# EAGLE board ViaCar Main (EAGLE 5.11)
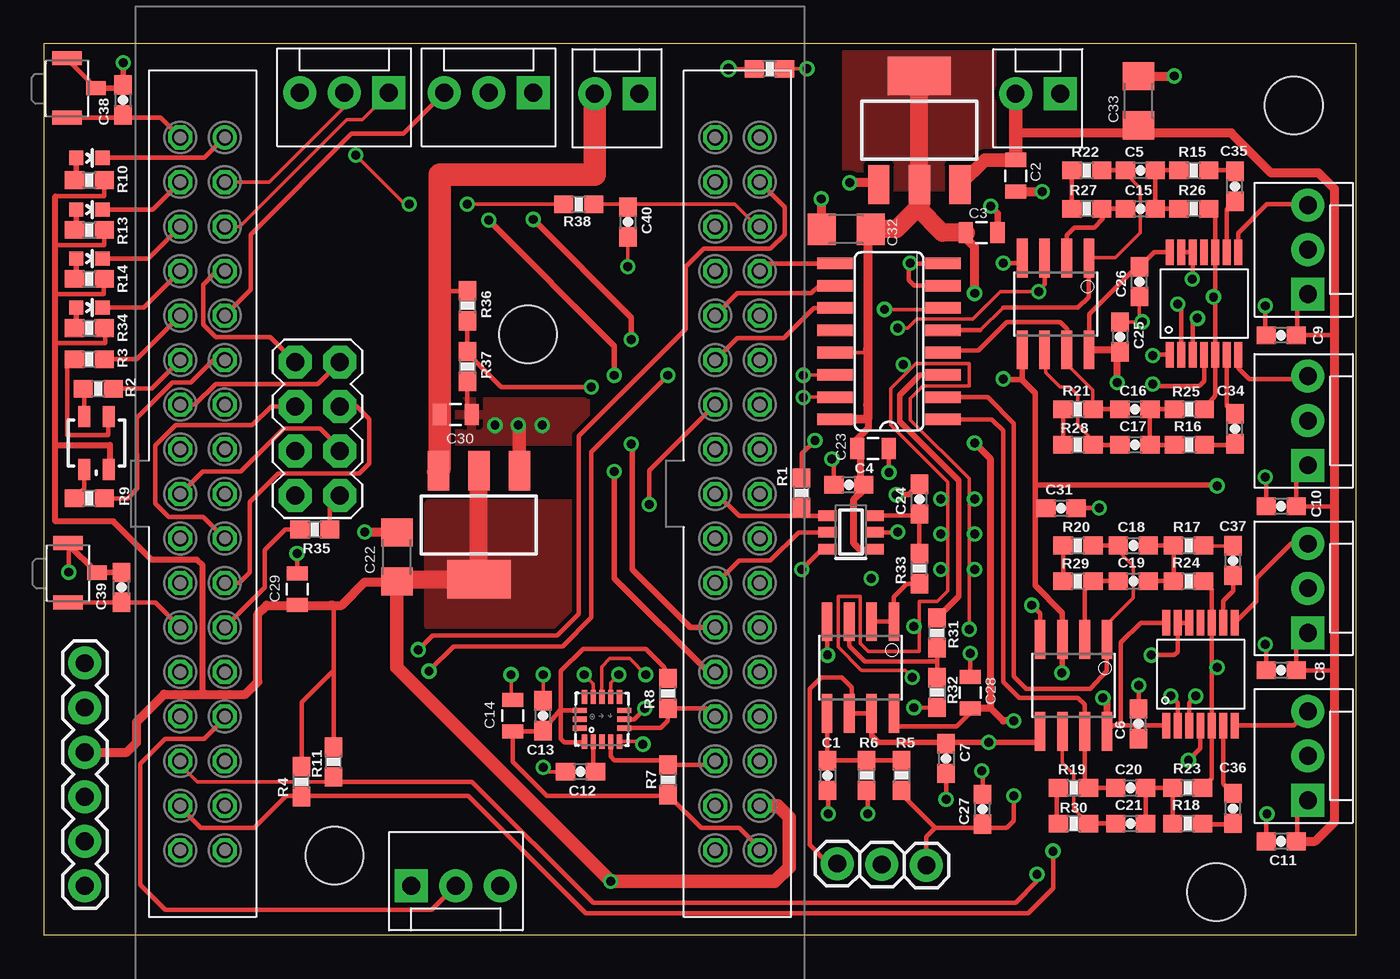
[diagram p0: board, top side]
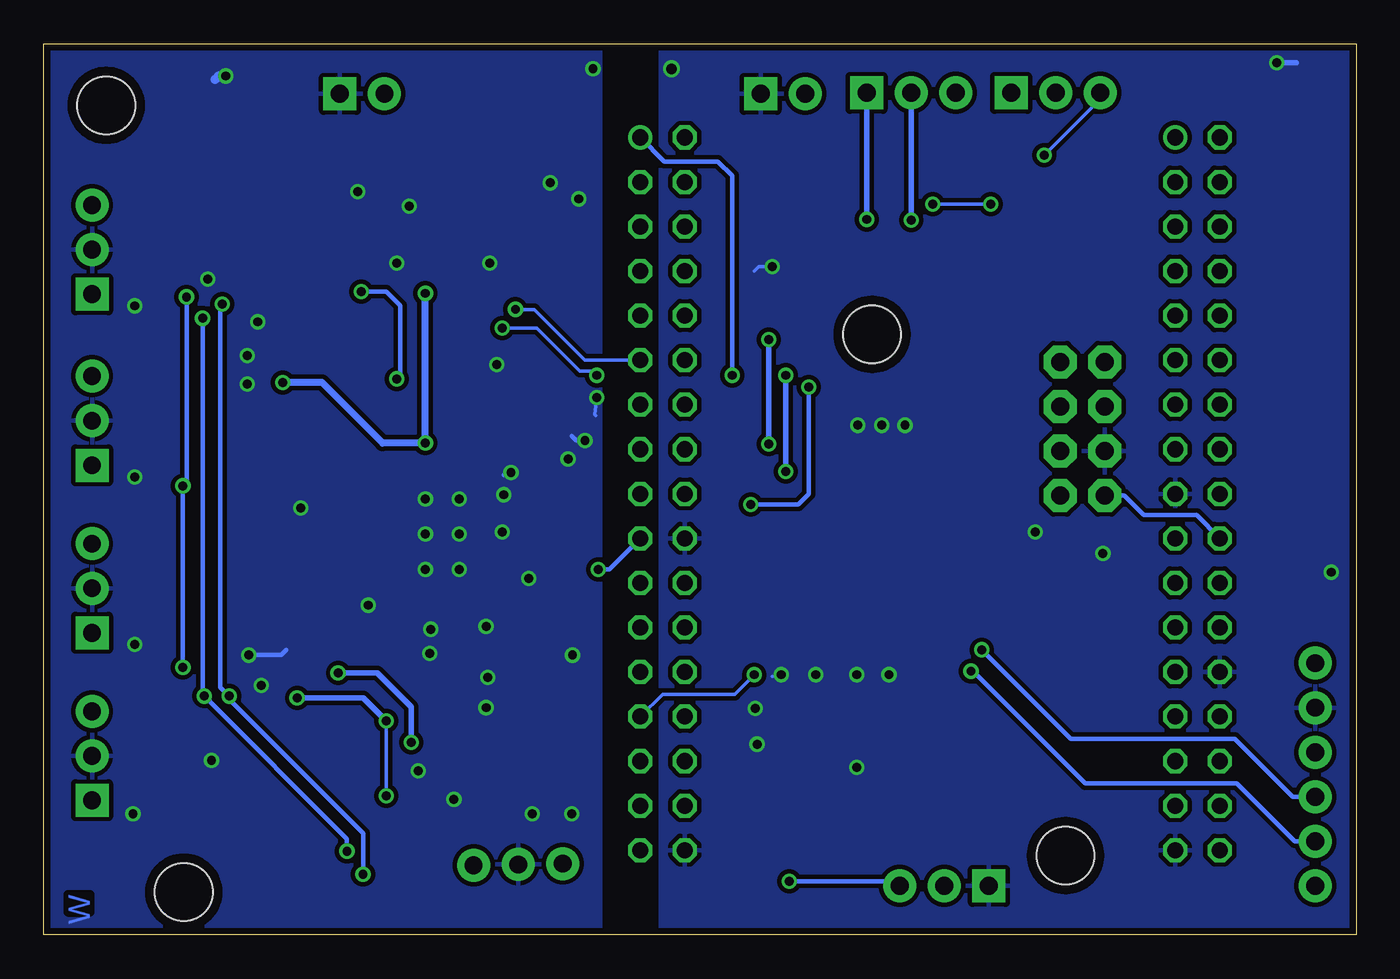
[diagram p1: board, bottom side, seen from below]

Size 74.78 x 50.8 mm. Coordinates in mm from the lower left corner, seen from the top.
Outline: 0,0 74.78,0 74.78,50.8 0,50.8 0,0
Copper layers (1*16): Top 0.0356mm / dielectric 1.5011mm / Bottom 0.0356mm
Design rules "LaenPCBOrder": minimum track width 6mil, minimum drill 13mil, track to track 6mil, track to pad 6mil, pad to pad 6mil, via to via 6mil, smd to smd 6mil, copper to edge 15mil, drill to drill 6mil, minimum pad ring 7mil, minimum via ring 7mil, stop-mask expansion 4mil, vias tented up to drill 0mil, thermal gap 10mil

## Footprints (pad centres in the part's own frame; a part is rotated, then mirrored left to right if it is on the bottom)
0603-CAP = smd 1.1 x 1: 1 -0.85,0; 2 0.85,0
0805 = smd 0.8 x 1.2: 1 -0.9,0; 2 0.9,0
1206 = smd 1.6 x 1.8: 1 -1.4,0; 2 1.4,0
SO16 = smd 0.66 x 2.032: 1 -4.445,-3.073; 2 -3.175,-3.073; 3 -1.905,-3.073; 4 -0.635,-3.073; 5 0.635,-3.073; 6 1.905,-3.073; 7 3.175,-3.073; 8 4.445,-3.073; 9 4.445,3.073; 10 3.175,3.073; 11 1.905,3.073; 12 0.635,3.073; 13 -0.635,3.073; 14 -1.905,3.073; 15 -3.175,3.073; 16 -4.445,3.073
SO08 = smd 0.61 x 2.21: 1 -1.905,-2.616; 2 -0.635,-2.616; 3 0.635,-2.616; 4 1.905,-2.616; 5 1.905,2.616; 6 0.635,2.616; 7 -0.635,2.616; 8 -1.905,2.616
SOT223 = smd 1.219 x 2.235: 1 -2.311,-3.099; 2 0,-3.099; 3 2.311,-3.099 | smd 3.6 x 2.2: 4 0,3.099
MOLEX-1X3 = drill 1.016 pad 1.88 square: 1 0,0 | drill 1.016 pad 1.88 round: 2 2.54,0; 3 5.08,0
MOLEX-1X2 = drill 1.016 pad 1.88 square: 1 0,0 | drill 1.016 pad 1.88 round: 2 2.54,0
STAND-OFF = hole 3.302: 0,0
1X06 = drill 1.016 pad 1.88 round: 1 0,0; 2 2.54,0; 3 5.08,0; 4 7.62,0; 5 10.16,0; 6 12.7,0
LED-0603 = smd 0.8 x 0.8: A 0,-0.75; C 0,0.75
0603-RES = smd 1.1 x 1: 1 -0.85,0; 2 0.85,0
1X01 = drill 1.016 pad 1.88 round: 1 0,0
QFN-16_0.5MM = smd 0.8 x 0.3: 1 -1.275,1; 2 -1.275,0.5; 3 -1.275,0; 4 -1.275,-0.5; 5 -1.275,-1; 9 1.275,-1; 10 1.275,-0.5; 11 1.275,0; 12 1.275,0.5; 13 1.275,1 | smd 0.3 x 0.8: 6 -0.5,-1.275; 7 0,-1.275; 8 0.5,-1.275; 14 0.5,1.275; 15 0,1.275; 16 -0.5,1.275
OPENLPC1769-BREAKOUT = drill 0.914 round: 1 -15.24,-20.32; 35 15.24,-20.32 | drill 0.914 octagon: 2 -12.7,-20.32; 3 -15.24,-17.78; 4 -12.7,-17.78; 5 -15.24,-15.24; 6 -12.7,-15.24; 7 -15.24,-12.7; 8 -12.7,-12.7; 9 -15.24,-10.16; 10 -12.7,-10.16; 11 -15.24,-7.62; 12 -12.7,-7.62; 13 -15.24,-5.08; 14 -12.7,-5.08; 15 -15.24,-2.54; 16 -12.7,-2.54; 17 -15.24,0; 18 -12.7,0; 19 -15.24,2.54; 20 -12.7,2.54; 21 -15.24,5.08; 22 -12.7,5.08; 23 -15.24,7.62; 24 -12.7,7.62; 25 -15.24,10.16; 26 -12.7,10.16; 27 -15.24,12.7; 28 -12.7,12.7; 29 -15.24,15.24; 30 -12.7,15.24; 31 -15.24,17.78; 32 -12.7,17.78; 33 -15.24,20.32; 34 -12.7,20.32; 36 17.78,-20.32; 37 15.24,-17.78; 38 17.78,-17.78; 39 15.24,-15.24; 40 17.78,-15.24; 41 15.24,-12.7; 42 17.78,-12.7; 43 15.24,-10.16; 44 17.78,-10.16; 45 15.24,-7.62; 46 17.78,-7.62; 47 15.24,-5.08; 48 17.78,-5.08; 49 15.24,-2.54; 50 17.78,-2.54; 51 15.24,0; 52 17.78,0; 53 15.24,2.54; 54 17.78,2.54; 55 15.24,5.08; 56 17.78,5.08; 57 15.24,7.62; 58 17.78,7.62; 59 15.24,10.16; 60 17.78,10.16; 61 15.24,12.7; 62 17.78,12.7; 63 15.24,15.24; 64 17.78,15.24; 65 15.24,17.78; 66 17.78,17.78; 67 15.24,20.32; 68 17.78,20.32
LED-TRICOLOR-SMD = smd 0.7 x 1.2: A 0.7,-1.5; B 0.7,1.5; G -0.7,1.5; R -0.7,-1.5
SOT-23-6 = smd 0.6 x 1.05: 1 0,0; 2 0.95,0; 3 1.9,0; 4 1.9,2.7; 5 0.95,2.7; 6 0,2.7
B3U-3100P = smd 0.8 x 1.7: 1 0,0; 2 3.4,0 | smd 0.8 x 1.1: 3 1.7,-1.65
MCP-TSSOP-14 = smd 1.45 x 0.45: P$1 0,0; P$2 0,-0.65; P$3 0,-1.3; P$4 0,-1.95; P$5 0,-2.6; P$6 0,-3.25; P$7 0,-3.9; P$8 5.85,-3.9; P$9 5.85,-3.25; P$10 5.85,-2.6; P$11 5.85,-1.95; P$12 5.85,-1.3; P$13 5.85,-0.65; P$14 5.85,0
2X4 = drill 1.016 pad 1.88 octagon: 1 -3.81,-1.27; 2 -3.81,1.27; 3 -1.27,-1.27; 4 -1.27,1.27; 5 1.27,-1.27; 6 1.27,1.27; 7 3.81,-1.27; 8 3.81,1.27

## Placement (x,y rotation side)
C1  .1u  [0603-CAP]  44.65,9.09 270 top
C2  10uF  [0805]  55.37,43.28 270 top
C3  1uF  [0805]  53.44,40.03 0 top
C4  100n  [0603-CAP]  45.87,25.65 180 top
C5  270p  [0603-CAP]  62.48,43.59 0 top
C6  100n  [0603-CAP]  62.38,12.04 90 top
C7  100n  [0603-CAP]  51.41,10.06 270 top
C8  100n  [0603-CAP]  70.51,15.09 180 top
C9  100n  [0603-CAP]  70.51,34.19 180 top
C10  100n  [0603-CAP]  70.51,24.43 180 top
C11  100n  [0603-CAP]  70.51,5.33 180 top
C12  .1uF  [0603-CAP]  30.58,9.3 180 top
C13  .1uF  [0603-CAP]  28.45,12.5 90 top
C14  1uF  [0805]  26.72,12.5 90 top
C15  270p  [0603-CAP]  62.48,41.4 0 top
C16  270p  [0603-CAP]  62.18,29.97 0 top
C17  270p  [0603-CAP]  62.18,27.94 0 top
C18  270p  [0603-CAP]  62.08,22.2 0 top
C19  270p  [0603-CAP]  62.08,20.17 0 top
C20  270p  [0603-CAP]  61.93,8.38 0 top
C21  270p  [0603-CAP]  61.93,6.35 0 top
C22  10uF  [1206]  20.12,21.54 90 top
C23  1uF  [0805]  47.24,27.74 0 top
C24  DNI  [0603-CAP]  49.89,24.84 90 top
C25  100n  [0603-CAP]  61.32,34.09 270 top
C26  100n  [0603-CAP]  62.43,37.24 90 top
C27  100n  [0603-CAP]  53.49,7.16 90 top
C28  1uF  [0805]  52.78,13.82 90 top
C29  1uF  [0805]  14.43,19.71 90 top
C30  1uF  [0805]  23.47,29.67 0 top
C31  100n  [0603-CAP]  57.96,24.33 0 top
C32  10uF  [1206]  45.72,40.23 180 top
C33  1uF  [1206]  62.38,47.55 90 top
C34  100n  [0603-CAP]  67.87,28.85 90 top
C35  100n  [0603-CAP]  67.87,42.67 90 top
C36  100n  [0603-CAP]  67.77,7.21 90 top
C37  100n  [0603-CAP]  67.77,21.34 90 top
C38  100n  [0603-CAP]  4.52,47.6 90 top
C39  100n  [0603-CAP]  4.42,19.81 90 top
C40  100n  [0603-CAP]  33.27,40.64 270 top
IC1  4051D  [SO16]  48.16,33.83 90 top
IC2  OPA2340U  [SO08]  46.53,15.24 180 top
IC3  VREG1  [SOT223]  49.89,45.87 0 top
IC4  OPA2340U  [SO08]  57.66,35.97 180 top
IC5  OPA2340U  [SO08]  58.67,14.22 180 top
IC6  VREG1  [SOT223]  24.79,23.37 180 top
JP1  CH1  [MOLEX-1X3]  72.03,36.53 90 top
JP2  CH2  [MOLEX-1X3]  72.03,26.77 90 top
JP3  CH3  [MOLEX-1X3]  72.03,17.22 90 top
JP4  CH4  [MOLEX-1X3]  72.03,7.67 90 top
JP5  DPWR  [MOLEX-1X2]  57.91,47.96 180 top
JP6  ENCODER  [MOLEX-1X3]  20.93,2.79 0 top
JP7  APWR  [MOLEX-1X2]  33.93,47.96 180 top
JP8  M Output  [MOLEX-1X3]  27.89,48.01 180 top
JP9  STAND-OFF  [STAND-OFF]  16.56,4.52 0 top
JP10  STAND-OFF  [STAND-OFF]  27.58,34.24 0 top
JP11  STAND-OFF  [STAND-OFF]  71.22,47.29 0 top
JP12  M Input  [MOLEX-1X3]  19.66,48.01 180 top
JP13  XBEE  [1X06]  2.34,2.79 90 top
JP14  STAND-OFF  [STAND-OFF]  66.8,2.44 0 top
LED1  GREEN  [LED-0603]  2.59,44.3 270 top
LED2  GREEN  [LED-0603]  2.59,41.35 270 top
LED3  GREEN  [LED-0603]  2.59,38.56 270 top
LED4  GREEN  [LED-0603]  2.59,35.76 270 top
R1  DNI  [0603-RES]  43.18,25.2 90 top
R2  100  [0603-RES]  3.1,31.14 0 top
R3  100  [0603-RES]  2.59,32.82 0 top
R4  4.7k  [0603-RES]  14.68,8.74 90 top
R5  10k  [0603-RES]  48.87,9.09 270 top
R6  10k  [0603-RES]  46.89,9.09 90 top
R7  4.7k  [0603-RES]  35.56,8.84 270 top
R8  4.7k  [0603-RES]  35.56,13.77 90 top
R9  200  [0603-RES]  2.59,24.89 0 top
R10  330  [0603-RES]  2.59,43.03 0 top
R11  4.7k  [0603-RES]  16.51,9.86 90 top
R12  FB  [0603-RES]  41.35,49.38 180 top
R13  330  [0603-RES]  2.59,40.18 0 top
R14  330  [0603-RES]  2.59,37.39 0 top
R15  7.87k  [0603-RES]  65.53,43.59 0 top
R16  7.87k  [0603-RES]  65.28,27.94 0 top
R17  7.87k  [0603-RES]  65.23,22.2 0 top
R18  7.87k  [0603-RES]  65.18,6.35 0 top
R19  150k  [0603-RES]  58.67,8.38 0 top
R20  150k  [0603-RES]  58.93,22.2 0 top
R21  150k  [0603-RES]  58.93,29.97 0 top
R22  150k  [0603-RES]  59.44,43.59 0 top
R23  414  [0603-RES]  65.18,8.38 180 top
R24  414  [0603-RES]  65.23,20.17 180 top
R25  414  [0603-RES]  65.28,29.97 180 top
R26  414  [0603-RES]  65.53,41.4 180 top
R27  7.87k  [0603-RES]  59.44,41.4 180 top
R28  7.87k  [0603-RES]  58.93,27.94 180 top
R29  7.87k  [0603-RES]  58.93,20.17 180 top
R30  7.87k  [0603-RES]  58.67,6.35 180 top
R31  0  [0603-RES]  50.9,17.22 90 top
R32  DNI  [0603-RES]  50.9,13.82 270 top
R33  200  [0603-RES]  49.89,20.88 90 top
R34  330  [0603-RES]  2.59,34.59 0 top
R35  200  [0603-RES]  15.44,23.11 180 top
R36  100k  [0603-RES]  24.13,35.86 270 top
R37  10k  [0603-RES]  24.13,32.41 270 top
R38  1k  [0603-RES]  30.48,41.66 0 top
TP0  M01PTH  [1X01]  47.75,4.01 0 top
TP1  M01PTH  [1X01]  45.21,4.06 0 top
TP2  M01PTH  [1X01]  50.29,3.96 0 top
U1  MMA8452Q  [QFN-16_0.5MM]  31.8,12.29 90 top
U$1  OPENLPC1769-BREAKOUT  [OPENLPC1769-BREAKOUT]  25.55,25.15 180 top
U$2  LED-TRICOLOR  [LED-TRICOLOR-SMD]  3,28.04 0 top
U$10  ADS7883  [SOT-23-6]  47.35,22 90 top
U$11  B3U-3100P  [B3U-3100P]  1.32,46.58 90 top
U$12  B3U-3100P  [B3U-3100P]  1.37,18.95 90 top
U$13  MCP4651  [MCP-TSSOP-14]  64.16,33.07 90 top
U$14  MCP4651  [MCP-TSSOP-14]  63.96,11.94 90 top
U$19  M04X2  [2X4]  15.6,28.85 270 top

## Library data of the parts
C1-C40 IC3 IC6 JP1-JP14 LED1-LED4 R1-R38 TP0 TP1 TP2 U1 U$2 U$19 = SparkFun
IC1 = 40xx
IC2 IC4 IC5 = burr-brown; MF: TEXAS INSTRUMENTS; MPN: OPA2340UA; OC_FARNELL: 1101541; OC_NEWARK: 36K7581
U$1 = OpenLPC
U$10-U$14 = William

## Nets
3.3V: C13.1 C14.1 R7.2 R8.2 U1.1 U1.14 U$1.33
5V: C3.1 C4.1 C6.1 C23.1 C25.2 C26.2 C27.1 C28.1 C32.1 IC1.13 IC1.16 IC2.8 IC3.2 IC3.4 IC4.8 IC5.8 R5.2 TP2.1 U$10.1 U$13.P$14 U$14.P$1 U$14.P$14
A: IC1.11 U$1.12
ACC_INT1: U1.11 U$1.27
ADC_CS: U$1.19 U$10.6
ADC_SCLK: R1.1 U$1.18 U$10.4
ADC_SDO: U$1.22 U$10.5
AGND: C1.2 C2.2 C3.2 C4.2 C6.2 C7.2 C8.2 C9.2 C10.2 C11.2 C23.2 C24.2 C25.1 C26.1 C27.2 C28.2 C31.2 C32.2 C33.2 IC1.7 IC1.8 IC1.15 IC2.4 IC3.1 IC4.4 IC5.4 JP1.2 JP2.2 JP3.2 JP4.2 JP5.1 R1.2 R6.1 R12.1 R32.2 TP0.1 U$10.2 U$13.P$1 U$13.P$4 U$13.P$12 U$13.P$13 U$14.P$4 U$14.P$12 U$14.P$13
B: IC1.10 U$1.10
BAT_TEST: R36.2 R37.1 U$1.14
BRAKE: JP8.1 U$1.24
C: IC1.9 U$1.7
GND: C12.2 C13.2 C14.2 C22.2 C29.2 C30.2 C38.2 C39.2 C40.2 IC6.1 JP6.1 JP7.1 JP13.5 R12.2 R37.2 U1.5 U1.7 U1.10 U1.12 U$1.20 U$1.34 U$1.51 U$1.60 U$1.67 U$11.2 U$11.3 U$12.2 U$12.3 U$19.5
I_SENSE: C40.1 R38.2 U$1.5
IN1: JP1.3 U$13.P$8
IN2: JP2.3 U$13.P$7
IN3: JP3.3 U$14.P$8
IN4: JP4.3 U$14.P$7
INH: IC1.6 U$1.11
INT2(NC): U1.9
LCD_CLK: U$1.52 U$19.6
LCD_CS: U$1.53 U$19.3
LCD_DC: U$1.48 U$19.2
LCD_LED: R35.2 U$1.57
LCD_MOSI: U$1.55 U$19.4
LCD_RST: U$1.41 U$19.1
LCD_V: U$1.54 U$19.7
N$1: U$1.68
N$2: IC2.3 R31.1 R32.1
N$3: R2.1 U$2.G
N$4: R3.1 U$2.B
N$5: C30.1 IC6.3 JP7.2 R36.1
N$6: R9.1 U$2.R
N$7: JP12.3 R38.1
N$9: LED1.A R10.1
N$10: C1.1 IC2.5 R5.1 R6.2
N$11: LED2.A R13.1
N$12: LED3.A R14.1
N$13: LED4.A R34.1
N$15: C12.1 U1.2
N$20: C15.1 IC4.2 R27.1
N$21: C5.2 C15.2 R15.1 R26.2
N$22: C16.2 C17.2 R16.1 R25.2
N$23: C17.1 IC4.6 R28.1
N$24: R35.1 U$19.8
N$25: C18.2 C19.2 R17.1 R24.2
N$27: C19.1 IC5.2 R29.1
N$28: C20.2 C21.2 R18.1 R23.2
N$29: C21.1 IC5.6 R30.1
N$31: IC1.3 R31.2
N$32: IC2.1 IC2.2 R33.1
N$33: R22.1 R27.2
N$34: R21.1 R28.2
N$35: R20.1 R29.2
N$36: R19.1 R30.2
N$37: U$1.49
N$38: C24.1 R33.2 U$10.3
N$42: U$1.50
N$47: U$1.62
N$50: U$1.65
N$51: U$1.63
N$53: U$1.59
N$59: U$1.25
N$60: U$1.23
N$61: U$1.21
N$63: U$1.17
N$64: U$1.15
N$65: U$1.13
N$72: U$1.2
N$73: U$1.4
N$74: U$1.6
N$75: U$1.8
N$79: U$1.16
N$86: U$1.32
NA0: U$1.56
NA2: U$1.47
OTW: JP12.2 U$1.37
OUT1: C35.2 R15.2
OUT1_OS: C35.1 U$13.P$9
OUT2: C34.1 R16.2
OUT2_OS: C34.2 U$13.P$6
OUT3: C37.2 R17.2
OUT3_OS: C37.1 U$14.P$9
OUT4: C36.1 R18.2
OUT4_OS: C36.2 U$14.P$6
POS: JP6.2 U$1.61
RESET: U$1.29
RESET_OUT: U$1.9
RX: JP13.3 U$1.3
SCL_3V3: R7.1 U1.4 U$1.30
SCL_5V0: R11.1 U$1.64 U$13.P$2 U$14.P$2
SD: JP12.1 U$1.39
SDA_3V3: R8.1 U1.6 U$1.28
SDA_5V0: R4.1 U$1.66 U$13.P$3 U$14.P$3
SERVO: JP8.3 U$1.43
SPEED: JP8.2 U$1.26
SW1: C38.1 U$1.36 U$11.1
SW2: C39.1 U$1.58 U$12.1
TX: JP13.2 U$1.1
UI_LED1: R9.2 U$1.45
UI_LED2: R3.2 U$1.44
UI_LED3: R2.2 U$1.46
UI_LED4: LED1.C U$1.35
UI_LED5: LED2.C U$1.38
UI_LED6: LED3.C U$1.40
UI_LED7: LED4.C U$1.42
V+: C2.1 C8.1 C9.1 C10.1 C11.1 C33.1 IC3.3 JP1.1 JP2.1 JP3.1 JP4.1 JP5.2
VCC/2: C7.1 C31.1 IC1.14 IC2.6 IC2.7 IC4.3 IC4.5 IC5.3 IC5.5 R23.1 R24.1 R25.1 R26.1 TP1.1 U$13.P$5 U$13.P$10 U$14.P$5 U$14.P$10
VDD: C22.1 C29.1 IC6.2 IC6.4 JP6.3 JP13.4 R4.2 R10.2 R11.2 R13.2 R14.2 R34.2 U$1.31 U$2.A
X3: IC1.12
X4: C20.1 IC1.1 IC5.7 R19.2
X5: C5.1 IC1.5 IC4.1 R22.2
X6: C18.1 IC1.2 IC5.1 R20.2
X7: C16.1 IC1.4 IC4.7 R21.2

## Tracks (layer width: path | path; a pad name or v marks a point on that pad's centre or on a via)
3.3V
  Top 0.254: 29.39,12.79 29.46,12.79 | 29.46,12.79 U1.14 | 29.39,12.79 C13.1 28.2,11.6 C14.1 26.72,9.86 28.65,7.92 34.99,7.92 R7.2 37.45,6.1 39.62,6.1 40.79,4.93 U$1.33 | U1.1 30.8,11.09 30.68,10.97 29.67,10.97 29.46,11.18 29.46,12.79 | 29.39,12.79 29.46,12.87 29.46,15.04 30.73,16.31 34.29,16.31 35.36,15.24 R8.2
5V  (via drill 0.51)
  Top 0.203: 61.16,33.08 C25.2 | IC1.13 46.76,33.2 46.94,33.38
  Top 0.254: U$13.P$14 63.27,38.92 C26.2 62.14,37.8 61.98,37.8 59.56,35.38 IC4.8 | 61.16,11.94 60.91,11.94 IC5.8 | 61.16,11.94 62.18,11.94 | 62.18,11.94 U$14.P$1 | 62.18,11.94 C6.1 | U$14.P$14 62.49,17.79 61.37,16.66 61.37,12.14 61.16,11.94 | 46.34,28.13 C23.1 46.53,27.55 | C27.1 53.63,6.31 53.85,6.1 | 48.44,12.52 IC2.8 48.46,12.6 48.46,11.99 48.56,11.89 52.02,11.89 52.78,12.65 C28.1 | R5.2 48.87,8.03 50.8,6.1 | 50.8,6.1 53.28,6.1 C27.1 | v55.27,7.92 55.27,6.5 54.86,6.1 53.71,6.1 C27.1 | 53.95,12.9 53.94,12.92 | C25.2 61.2,33.35 | TP2.1 50.29,5.59 50.8,6.1
  Top 0.406: IC5.8 60.58,13.28 v60.35,13.51 | 46.25,29.39 IC1.16 | 49.89,42.27 IC3.2 | 46.53,27.55 46.53,25.87 C4.1 46.6,25.26 46.13,24.79 46.13,22.35 46.53,21.95 47.3,21.95 U$10.1 | v61.16,31.5 61.16,33.08 | v55.27,12.19 54.66,12.19 53.95,12.9 53.95,27.13 v53.03,28.04 | 53.94,12.92 C28.1 | 61.2,33.35 IC4.8 | 46.34,28.13 46.34,28.26 46.99,28.91 46.99,30.18 46.94,30.23
  Top 0.508: 46.25,29.39 46.94,29.41 46.94,30.23 46.94,33.38 46.94,39.5 C32.1 | 52.22,40.03 53.03,39.22 v53.03,36.58
  Top 1.016: C32.1 48.56,40.23 49.78,41.45 | 49.78,41.45 49.99,41.66 49.89,42.27 IC3.4 | C3.1 52.22,40.03 51.21,40.03 49.78,41.45
  Bottom 0.203: v55.27,7.92 v55.27,12.19
  Bottom 0.305: v60.35,13.51 56.59,13.51 v55.27,12.19
  Bottom 0.406: v53.03,36.58 v53.03,28.04 55.47,28.04 58.93,31.5 v61.16,31.5
  pour Top (isolate 0.254, no thermals): 54.05,42.67 54.05,50.8 45.72,50.8 45.72,42.67
A
  Top 0.254: IC1.11 43.87,35.74 42.16,34.04 39.52,34.04 U$1.12
ACC_INT1  (via drill 0.51)
  Top 0.203: U1.11 31.8,15.29 32.26,15.75 33.38,15.75 v34.29,14.83
  Bottom 0.203: U$1.27 39.52,13.72 35.41,13.72 v34.29,14.83
ADC_CS  (via drill 0.51)
  Top 0.254: U$10.6 44.35,22 v43.18,20.83
  Bottom 0.254: v43.18,20.83 42.57,20.83 U$1.19
ADC_SCLK
  Top 0.254: U$1.18 38.35,25.15 39.62,23.88 42.67,23.88 | 42.67,23.88 44.62,23.88 U$10.4 | R1.1 43.14,24.35 42.67,23.88
ADC_SDO
  Top 0.203: U$10.5 44.63,22.96
  Top 0.254: U$1.22 38.35,20.07 39.62,21.34 41.4,21.34 43.01,22.95 U$10.5
AGND  (via drill 0.51)
  Top 0.203: R12.1 v43.48,49.38 | C25.1 62.57,34.94 v62.59,34.95 62.43,35.1 C26.1 | v52.73,17.42 52.73,26.01 49.38,29.36 49.38,30.58 50.09,31.29 52.73,31.29 52.73,32.56 49.68,32.56 48.26,31.14 48.26,29.06 51.51,25.81 51.51,19.61 50.9,19 49.89,19 49.89,16.15 46.99,16.15 46.53,16.61 46.53,19.3 45.26,19.3 45.26,16.41 46.58,15.09 49.07,15.09 v49.48,14.68 | IC1.15 43.41,30.66 v43.28,30.63
  Top 0.254: C11.2 69.66,6.87 v69.7,6.91 | C10.2 69.66,25.77 v69.6,26.11 | v65.43,37.39 65.46,37.42 U$13.P$12 U$13.P$13 | C26.1 62.19,36.49 | U$13.P$4 66.11,31.57 65.84,31.29 63.3,31.29 v63.2,31.39 | 64.16,32.87 U$13.P$1 63.25,33.07 v63.2,33.02 | U$14.P$4 65.91,10.64 v65.23,9.96 | C6.2 v62.38,14.22 | U$14.P$12 U$14.P$13 64.61,16.14 64.41,15.95 v63.09,15.95 | IC1.8 49.45,38.28 v49.38,38.3 49.28,38.2 49.28,37.34 49.61,37.01 IC1.7 | 55.75,38.33 IC4.4 55.47,38.3 v54.66,38.3 | IC2.4 44.63,17.8 v44.65,15.95 | R32.2 50.86,12.97 v49.58,12.95 | IC5.4 56.77,18.31 v56.29,18.8 | 47.09,8.38 R6.1 46.94,8.35 v46.94,6.91 | C7.2 v51.41,7.72 | C27.2 53.49,9.3 v53.44,9.35 | C28.2 v52.78,16.05 | C31.2 v60.15,24.33 | 48.25,27.64 C23.2 48.14,26.38 v48.16,26.36 | v44.7,6.91 44.7,8.19 C1.2 | C8.2 69.66,16.5 v69.6,16.56 | v69.6,35.87 69.6,34.25 C9.2 | U$10.2 48.65,22.95 v48.67,22.96 | C4.2 45.02,27.01 v44.91,27.13 | R1.2 43.18,27.43 v43.94,28.19
  Top 0.305: v48.56,25.09 49.29,25.09 C24.2
  Top 0.381: C3.2 54.34,41.16 v53.95,41.55
  Top 0.508: IC3.1 47.55,42.88 v45.92,42.88 | C2.2 55.58,42.37 v56.9,42.37 | C32.2 44.32,41.43 v44.3,41.96 | C33.2 64.39,48.95 v64.41,48.97
  Bottom 0.203: v43.28,30.63 43.38,29.67 43.33,29.62
  Bottom 0.254: v69.6,26.11 69.7,26.01 | v63.09,15.95 61.27,15.95 60.96,16.26 | v48.16,26.36 48.41,26.36 48.56,26.21 | v43.94,28.19 44.45,28.19 44.7,28.45
  Bottom 0.508: v64.41,48.97 64.82,48.97 65.02,48.77
  other vias: 47.14,20.32 48.97,32.51 51.1,24.84 51.1,20.83 51.1,22.86 53.04,24.84 53.04,22.86 53.04,20.83 49.58,17.58
  pour Bottom (isolate 0.254): 75.18,50.8 43.08,50.8 43.08,0 75.18,0
B
  Top 0.254: IC1.10 44.17,37.01 43.74,36.58 39.52,36.58 U$1.10
BAT_TEST  (via drill 0.51)
  Top 0.254: R36.2 R37.1 24.13,33.17 26.06,31.24 v31.19,31.24 | v34.49,24.54 34.49,26.47 U$1.14
  Bottom 0.254: v31.19,31.24 31.19,25.15 31.8,24.54 v34.49,24.54
BRAKE  (via drill 0.51)
  Top 0.305: U$1.24 36.83,17.53 33.53,20.83 33.53,27.94 v33.48,27.99 | v33.48,33.93 33.48,35.2 v27.89,40.79
  Bottom 0.305: v33.48,27.99 v33.48,33.93 | v27.89,40.79 JP8.1
C
  Top 0.254: IC1.9 41.22,38.28 U$1.7
GND  (via drill 0.51, 0.6)
  Top 0.203: R12.2 v39.01,49.38 | U1.12 31.3,14.32 v30.79,14.83 | U1.10 32.3,14.37 v32.77,14.83 | C13.2 v28.45,14.83 | v26.62,14.83 26.62,13.5 C14.2 | C12.2 28.7,9.3 v28.45,9.55 | U1.5 33.99,11.02 v34.14,10.87 | v33.27,38.1 C40.2
  Top 0.254: U1.7 33.63,12.29 v34.24,12.9 | U$12.2 1.42,22.61 v1.42,20.68 | U$11.2 1.32,49.93 U$11.3 | C29.2 v14.43,21.74 | R37.2 24.13,29.91 C30.2
  Top 0.305: U$11.3 4.36,48.28 C38.2 v4.52,49.73 | U$12.3 4.41,20.65 C39.2
  Top 0.356: U$12.2 1.37,22.3 U$12.3
  Top 0.508: C22.2 18.27,22.94 v18.29,22.96
  Top 0.762: IC6.1 27.1,28.98 v27.03,29.06
  Bottom 0.203: v32.77,14.83 33.27,14.73 | v33.27,38.1 34.04,38.1 34.29,37.85
  Bottom 0.305: v4.52,49.73 3.4,49.73
  other vias: 28.4,29.06 25.7,29.06
  pour Bottom (isolate 0.254): 39.62,50.6 -2.03,50.8 -2.03,0 39.62,-0.2
  pour Top (isolate 0.254): 22.56,28.14 30.89,28.14 30.89,30.38 22.56,30.38
I_SENSE
  Top 0.203: U$1.5 40.64,40.39 39.37,41.66 33.44,41.66 C40.1 33.11,41.66 R38.2
IN1
  Top 0.254: 71.88,41.66 JP1.3 71.98,41.66 69.7,41.66 68.06,40.02 U$13.P$8
IN2
  Top 0.254: U$13.P$7 68.06,32.32 68.68,31.7 71.88,31.7 JP2.3
IN3
  Top 0.254: JP3.3 71.07,22.3 69.09,20.32 69.09,19.02 U$14.P$8
IN4
  Top 0.254: U$14.P$7 71.22,11.94 JP4.3
INH  (via drill 0.51)
  Top 0.203: v47.9,35.66 51.16,35.66 IC1.6
  Bottom 0.203: U$1.11 43.94,32.77 46.84,35.66 v47.9,35.66
LCD_CLK
  Top 0.254: U$19.6 16.87,27.74 15.75,28.85 13.66,28.85 11.23,26.42 9.04,26.42 U$1.52
LCD_CS
  Top 0.254: U$19.3 12.95,30.12 11.89,29.06 7.52,29.06 6.35,27.89 6.35,24.59 7.11,23.82 9.09,23.82 U$1.53
LCD_DC
  Top 0.254: U$1.48 8.59,30.23 9.8,31.39 15.6,31.39 U$19.2
LCD_LED
  Top 0.254: U$1.57 12.6,19.81 12.6,21.95 13.77,23.11 R35.2
LCD_MOSI
  Top 0.254: U$1.55 11.12,20.07 11.73,20.68 11.73,24.69 13.36,26.31 17.98,26.31 18.54,26.87 18.54,29.41 17.78,30.18 16.92,30.18 U$19.4
LCD_RST
  Top 0.254: U$1.41 9.86,37.85 9.09,37.08 9.09,34.8 9.8,34.09 12.9,34.09 U$19.1
LCD_V
  Bottom 0.254: U$19.7 13.21,25.04 12.09,23.93 9.09,23.93 U$1.54
N$2
  Top 0.254: IC2.3 45.9,16.48 46.79,15.6 50.9,15.6 | 50.9,15.6 R31.1 | 50.9,15.6 R32.1
N$3
  Top 0.254: U$2.G 2.3,31.09 R2.1
  Top 0.305: R2.1 2.04,30.84
N$4
  Top 0.254: U$2.B 3.66,29.54 3.66,28.5 1.32,28.5 1.32,32.4 R3.1
N$5
  Top 0.254: C30.1 22.49,28.51 22.55,28.45 | R36.1 22.69,36.72 22.55,36.58
  Top 1.016: 22.55,26.62 22.35,26.42 22.43,26.42 IC6.3
  Top 1.27: JP7.2 31.39,43.33 22.55,43.33 22.55,36.58 22.55,28.45 22.55,26.62
N$6
  Top 0.254: U$2.R 2.3,25.45 R9.1
  Top 0.305: R9.1 2.04,25.19
N$7  (via drill 0.51)
  Top 0.203: v24.13,41.66 R38.1 | v20.83,41.66 20.57,41.66 v17.78,44.45
  Bottom 0.203: v20.83,41.66 v24.13,41.66 | v17.78,44.45 14.73,47.5 14.73,47.85 JP12.3
N$9
  Top 0.305: LED1.A 1.84,43.13 R10.1
N$10
  Top 0.254: IC2.5 44.63,10.38 C1.1 | C1.1 44.7,10.3 | R5.1 R6.2 C1.1
N$11
  Top 0.305: LED2.A 1.84,40.28 R13.1
N$12
  Top 0.305: LED3.A 1.84,37.54 R14.1
N$13
  Top 0.305: LED4.A 1.84,34.7 R34.1
N$15
  Top 0.254: U1.2 31.3,9.37 C12.1
N$20
  Top 0.254: C15.1 R27.1 60.35,41.34 60.35,40.84 59.84,40.34 58.73,40.34 58.29,39.9 IC4.2
N$21
  Top 0.254: R15.1 C5.2 C15.2 R26.2
N$22
  Top 0.254: R25.2 C16.2 C17.2 R16.1
N$23
  Top 0.203: R28.1 59.78,28.21 58.93,29.06 58.93,30.79 58.47,31.24 57.91,31.24 57.1,32.05 57.1,33.27 IC4.6
  Top 0.254: 61.02,27.89 C17.1 R28.1
N$24
  Top 0.254: R35.1 16.29,24.47 U$19.8
N$25
  Top 0.254: C19.2 R24.2 R17.1 C18.2
N$27
  Top 0.254: C19.1 R29.1 59.31,19.7 IC5.2
N$28
  Top 0.254: R18.1 R23.2 C20.2 C21.2
N$29
  Top 0.203: R30.1 58.67,7.17 58.67,9.14 58.04,9.8 58.04,10.69
  Top 0.254: R30.1 59.52,6.3 | 58.04,10.69 IC5.6 | R30.1 59.54,6.18 | R30.1 C21.1
N$31
  Top 0.305: IC1.3 49.91,31.93 48.77,30.79 48.77,29.26 52.12,25.91 52.12,19.29 R31.2
N$32
  Top 0.254: IC2.2 IC2.1 48.44,19.28 49.17,20.02 49.87,20.02 R33.1
N$33
  Top 0.254: R27.2 R22.1
N$34
  Top 0.254: R28.2 R21.1
N$35
  Top 0.254: R29.2 R20.1
N$36
  Top 0.254: R19.1 57.72,8.13 57.72,6.45 R30.2
N$38
  Top 0.254: R33.2 C24.1 49.79,23.9 U$10.3
OTW
  Top 0.203: U$1.37 12.85,42.93 17.12,47.19
  Top 0.254: JP12.2 17.12,47.19
OUT1
  Top 0.254: R15.2 67.8,43.59 C35.2
OUT1_OS
  Top 0.254: U$13.P$9 67.41,41.36 C35.1
OUT2
  Top 0.254: 66.23,28.04 R16.2 67.8,27.94 C34.1
OUT2_OS
  Top 0.254: U$13.P$6 67.41,30.16 C34.2
OUT3
  Top 0.203: C37.2 66.09,22.19 R17.2
  Top 0.254: 66.45,22.25 66.13,22.25 R17.2
OUT3_OS
  Top 0.254: U$14.P$9 67.21,19.05 67.77,19.61 C37.1
OUT4
  Top 0.254: R18.2 66.08,6.3 67.7,6.3 C36.1
OUT4_OS
  Top 0.254: U$14.P$6 67.21,8.62 C36.2
POS
  Top 0.254: U$1.61 10.31,12.34 9.14,11.18 6.91,11.18 5.49,9.75 5.49,2.85 6.91,1.42 22.1,1.42 JP6.2
RX  (via drill 0.51)
  Top 0.254: v21.34,16.26 22.15,17.07 29.26,17.07 30.48,18.29 30.48,28.45 36.58,34.54 36.58,38.1 37.59,39.12 41.4,39.12 42.22,39.93 42.22,41.5 U$1.3
  Bottom 0.254: JP13.3 3.61,7.87 6.91,11.18 16.26,11.18 v21.34,16.26
SCL_3V3
  Top 0.254: U1.4 32.3,10.17 32.51,9.96 35.32,9.96 R7.1 38.04,9.69 U$1.30
SCL_5V0  (via drill 0.51)
  Top 0.203: 7.77,9.7 8.74,8.74 16.66,8.74
  Top 0.254: U$13.P$2 64.81,35.77 v64.62,35.97 | v64.21,13.61 64.61,13.22 U$14.P$2 | U$1.64 7.77,9.7 | R11.1 16.71,8.79 16.66,8.74 24.38,8.74 31.29,1.83 55.37,1.83 56.59,3.05 v56.59,3.45
  Bottom 0.254: v64.62,35.97 64.72,35.76 64.72,14.12 v64.21,13.61 64.21,13.41 56.59,5.79 v56.59,3.45
SD
  Top 0.203: U$1.39 11.18,40.39 17.27,46.48 18.14,46.48 JP12.1
SDA_3V3
  Top 0.254: U1.6 35.16,11.79 35.56,12.19 R8.1 37.78,12.92 U$1.28
SDA_5V0  (via drill 0.51)
  Top 0.254: U$13.P$3 65.46,34.98 v65.73,35.15 | U$1.66 7.77,7.26 8.94,6.1 11.99,6.1 13.82,7.92 14.43,7.92 | R4.1 14.46,7.89 14.43,7.92 | 14.43,7.92 24.18,7.92 30.89,1.22 56.08,1.22 57.51,2.64 v57.51,4.78 | U$14.P$3 65.26,13.24 v65.63,13.61
  Bottom 0.254: v65.73,35.15 65.73,13.72 v65.63,13.61 57.51,5.49 v57.51,4.78
SERVO
  Top 0.254: JP8.3 20.47,45.67 17.53,45.67 11.79,39.93 11.79,36.78 U$1.43
SPEED  (via drill 0.51)
  Top 0.305: U$1.26 37.85,14.99 32.51,20.32 v32.51,26.42 | v32.51,31.9 32.51,33.58 v25.35,40.74
  Bottom 0.305: v32.51,26.42 v32.51,31.9 | v25.35,40.74 JP8.2
SW1
  Top 0.254: U$11.1 4.93,46.58 6.66,46.58 U$1.36
  Top 0.305: C38.1 4.76,46.75 4.93,46.58
SW2
  Top 0.254: U$12.1 4.06,18.95 6.35,18.95 U$1.58
  Top 0.305: C39.1 4.08,18.96 4.06,18.95
TX  (via drill 0.51)
  Top 0.254: v21.95,15.04 23.37,16.46 29.57,16.46 31.19,18.09 31.19,27.53 v35.56,31.9
  Bottom 0.254: JP13.2 3.5,5.33 6.81,8.64 15.44,8.64 21.84,15.04 v21.95,15.04 | v35.56,31.9 35.56,43.28 36.37,44.09 39.42,44.09 U$1.1
UI_LED1
  Top 0.254: R9.2 4.78,24.89 5.33,25.45 5.28,29.46 7.32,31.5 8.38,31.5 9.65,32.77 U$1.45
UI_LED2
  Top 0.254: R3.2 5.28,32.82 U$1.44
UI_LED3
  Top 0.254: R2.2 6.15,31.14 U$1.46
UI_LED4
  Top 0.254: LED1.C 9.14,44.3 U$1.35
UI_LED5
  Top 0.254: LED2.C 6.2,41.35 U$1.38
UI_LED6
  Top 0.254: LED3.C 5.94,38.56 U$1.40
UI_LED7
  Top 0.254: LED4.C 5.69,35.76 U$1.42
V+
  Top 0.254: 73.51,36.52 73.51,34.71 | 73.56,24.38 73.51,24.43 C10.1 71.36,26.1 JP2.1 | JP4.1 71.78,7.67 71.42,7.32 71.42,5.4 C11.1 | JP3.1 71.36,16.55 C8.1 73.51,15.09 73.56,15.14 | 73.56,34.04 73.41,34.19 C9.1 71.42,34.25 71.42,35.87 72.03,36.47 JP1.1
  Top 0.356: 73.56,36.58 73.51,36.52
  Top 0.508: C2.1 55.37,44.08 | 62.99,45.72 67.67,45.72 69.95,43.43 72.64,43.43 73.56,42.52 73.56,36.58 73.56,34.04 73.56,24.38 73.56,15.14 73.56,6.45 72.44,5.33 C11.1 | 62.99,45.72 55.37,45.72 | C33.1 62.56,46.15 62.99,45.72
  Top 0.762: JP5.2 55.37,45.72 C2.1 53.6,44.18 IC3.3
VCC/2  (via drill 0.51)
  Top 0.203: v48.67,34.59 49.23,34.59 49.73,35.1 52.93,35.1 54.51,36.68 v56.69,36.68 | IC1.14 43.41,31.93 v43.28,31.9
  Top 0.254: IC2.7 IC2.6 46.02,12.75 46.02,14.12 45.47,14.68 44.3,14.68 43.64,14.02 43.64,5.13 44.7,4.06 TP1.1 45.16,4.06 | R25.1 66.76,30.76 U$13.P$5 66.76,36.58 U$13.P$10 | 66.56,15.23 U$14.P$5 66.56,8.91 R23.1 | R24.1 66.56,19.69 U$14.P$10 66.56,15.23 | U$13.P$10 66.76,41.23 R26.1 | U$13.P$10 66.76,36.89 | v66.85,15.24 66.56,15.23 | IC4.3 57.02,37.11 v56.69,36.68 | v54.66,31.7 54.94,31.7 | v58.01,14.94 58.04,15.27 | 51.34,10.97 C7.1 51.47,10.97 | 56.79,10.97 56.79,11.58 IC5.5
  Top 0.305: 56.49,24.38 56.49,19.91 58.04,18.36 IC5.3 58.04,15.27 | IC2.7 47.17,11.35 47.55,10.97 51.34,10.97 | 56.49,24.38 C31.1 | 51.47,10.97 v53.85,10.97 56.79,10.97 | v66.65,36.37 66.65,36.47 66.76,36.58 | 56.49,24.38 56.49,25.65 | 56.49,25.65 56.49,30.89 55.73,31.65 | 55.73,31.65 54.71,31.65 v54.66,31.7 | IC4.5 55.75,31.67 55.73,31.65 | 56.49,25.65 66.9,25.65 v66.85,25.6
  Bottom 0.203: v48.67,34.59 46.69,34.59 44.25,32.16 43.54,32.16 v43.28,31.9
  Bottom 0.254: v56.69,36.68 55.27,36.68 54.46,35.87 54.46,31.9 v54.66,31.7 | v66.65,36.37 66.65,25.81 v66.85,25.6 v66.85,15.24
  Bottom 0.305: v58.01,14.94 55.78,14.94 53.85,13.01 v53.85,10.97
VDD  (via drill 0.51)
  Top 0.254: R4.2 14.68,13.26 16.51,15.09 | 16.51,15.09 R11.2 | 16.51,15.09 16.51,18.64 16.46,18.8 | C29.1 16.24,18.81 16.36,18.8 | 0.66,42.11 3.44,42.11 R10.2 | R13.2 3.45,40.18 3.45,39.32 0.66,39.32 | R34.2 3.5,34.59 3.5,33.73 0.66,33.73 | R14.2 3.4,37.44 3.4,36.52 0.66,36.52
  Top 0.305: R34.2 3.45,34.58
  Top 0.356: 9.14,13.72 9.04,13.82 9.04,21.08 8.74,21.39 6.15,21.39 3.96,23.57 0.66,23.57 0.66,27.94 | 3.76,26.54 3.76,27.94 0.66,27.94 | 0.66,27.94 0.66,33.73 0.66,36.52 0.66,39.32 0.66,42.11
  Top 0.406: 3.76,26.54 U$2.A
  Top 0.508: JP13.4 4.72,10.41 5.28,10.97 5.28,12.14 6.86,13.72 9.14,13.72 11.48,13.72 12.19,14.43 12.19,18.29 12.7,18.8 16.36,18.8 16.46,18.8 16.97,18.8 18.29,20.12 19.71,20.12 | 19.91,20.12 20.57,20.12 20.73,20.27
  Top 0.762: IC6.4 25.06,20 | U$1.31 41.81,7.37 42.47,6.71 42.47,3.86 41.66,3.05 v32.31,3.05 20.12,15.24 C22.1
  Top 1.016: IC6.2 IC6.4 20.73,20.27 20.25,20.27 C22.1 | 19.71,20.12 19.91,20.12
  Bottom 0.254: v32.31,3.05 26.26,3.05 JP6.3
  pour Top (isolate 0.254, no thermals): 21.95,24.59 30.78,24.59 30.89,17.58 21.95,17.58
X4
  Top 0.254: R19.2 C20.1 | R19.2 59.42,8.33 | R19.2 59.31,8.24 IC5.7 59.31,13.13 58.93,13.51 55.58,13.51 54.66,14.43 54.66,28.75 54.03,29.39 IC1.1
X5
  Top 0.203: 61.47,43.59 62.48,42.57 62.48,40.03 61.06,38.61 59.59,38.61 | 53.37,34.47 54.66,35.76
  Top 0.254: C5.1 R22.2 61.47,43.59 | 59.59,38.61 IC4.1 59.54,38.56 59.54,36.37 58.93,35.76 54.66,35.76 | IC1.5 53.37,34.47
X6
  Top 0.203: C18.1 61.23,21.88 62.08,21.03 62.08,19.2 60.58,17.7
  Top 0.254: IC5.1 60.58,17.7 60.55,17.68 60.55,15.04 59.64,14.02 55.98,14.02 55.27,14.73 55.27,29.16 53.77,30.66 IC1.2 | 61.32,22.2 C18.1 R20.2
X7
  Top 0.203: R21.2 59.78,31.05 58.32,32.51 58.32,33.33 IC4.7
  Top 0.254: C16.1 R21.2 59.63,29.97 | IC1.4 51.36,33.33 53.24,33.33 54.86,34.95 57.91,34.95 58.32,34.54 58.32,33.38 IC4.7

## Text on the board
Bottom: W
tValues: GND | 7V+ | A | 1 | Current Sense | Temp Warning | Shutdown | Servo PWM | Speed PWM | Brake PWM | 7V+ | GND | 1 | 2 | 3 | 4 | RST | DC | Status | CS | MOSI | GND | CLK | B | V* | LED | GND | 5V | RX | GND | Encoder | 5V | TX | 4 | 2V5 | AGND | 5V0
bValues: ViaCar 2012 A/D Board V1.0 | William Breidenthal | Input 1 | Input 2 | Input 3 | Input 4